# Altium PCB kien_PCB.PcbDoc
Units mil, origin at the board's own origin, x right, y up, seen from the top; angles counter-clockwise.
Board outline 6000 x 4000 mil, 2 copper layers (Top Layer, Bottom Layer); 56 components, 43 nets, 324 pads, 44 vias.
Unrouted connection lines stored in the file: 3.
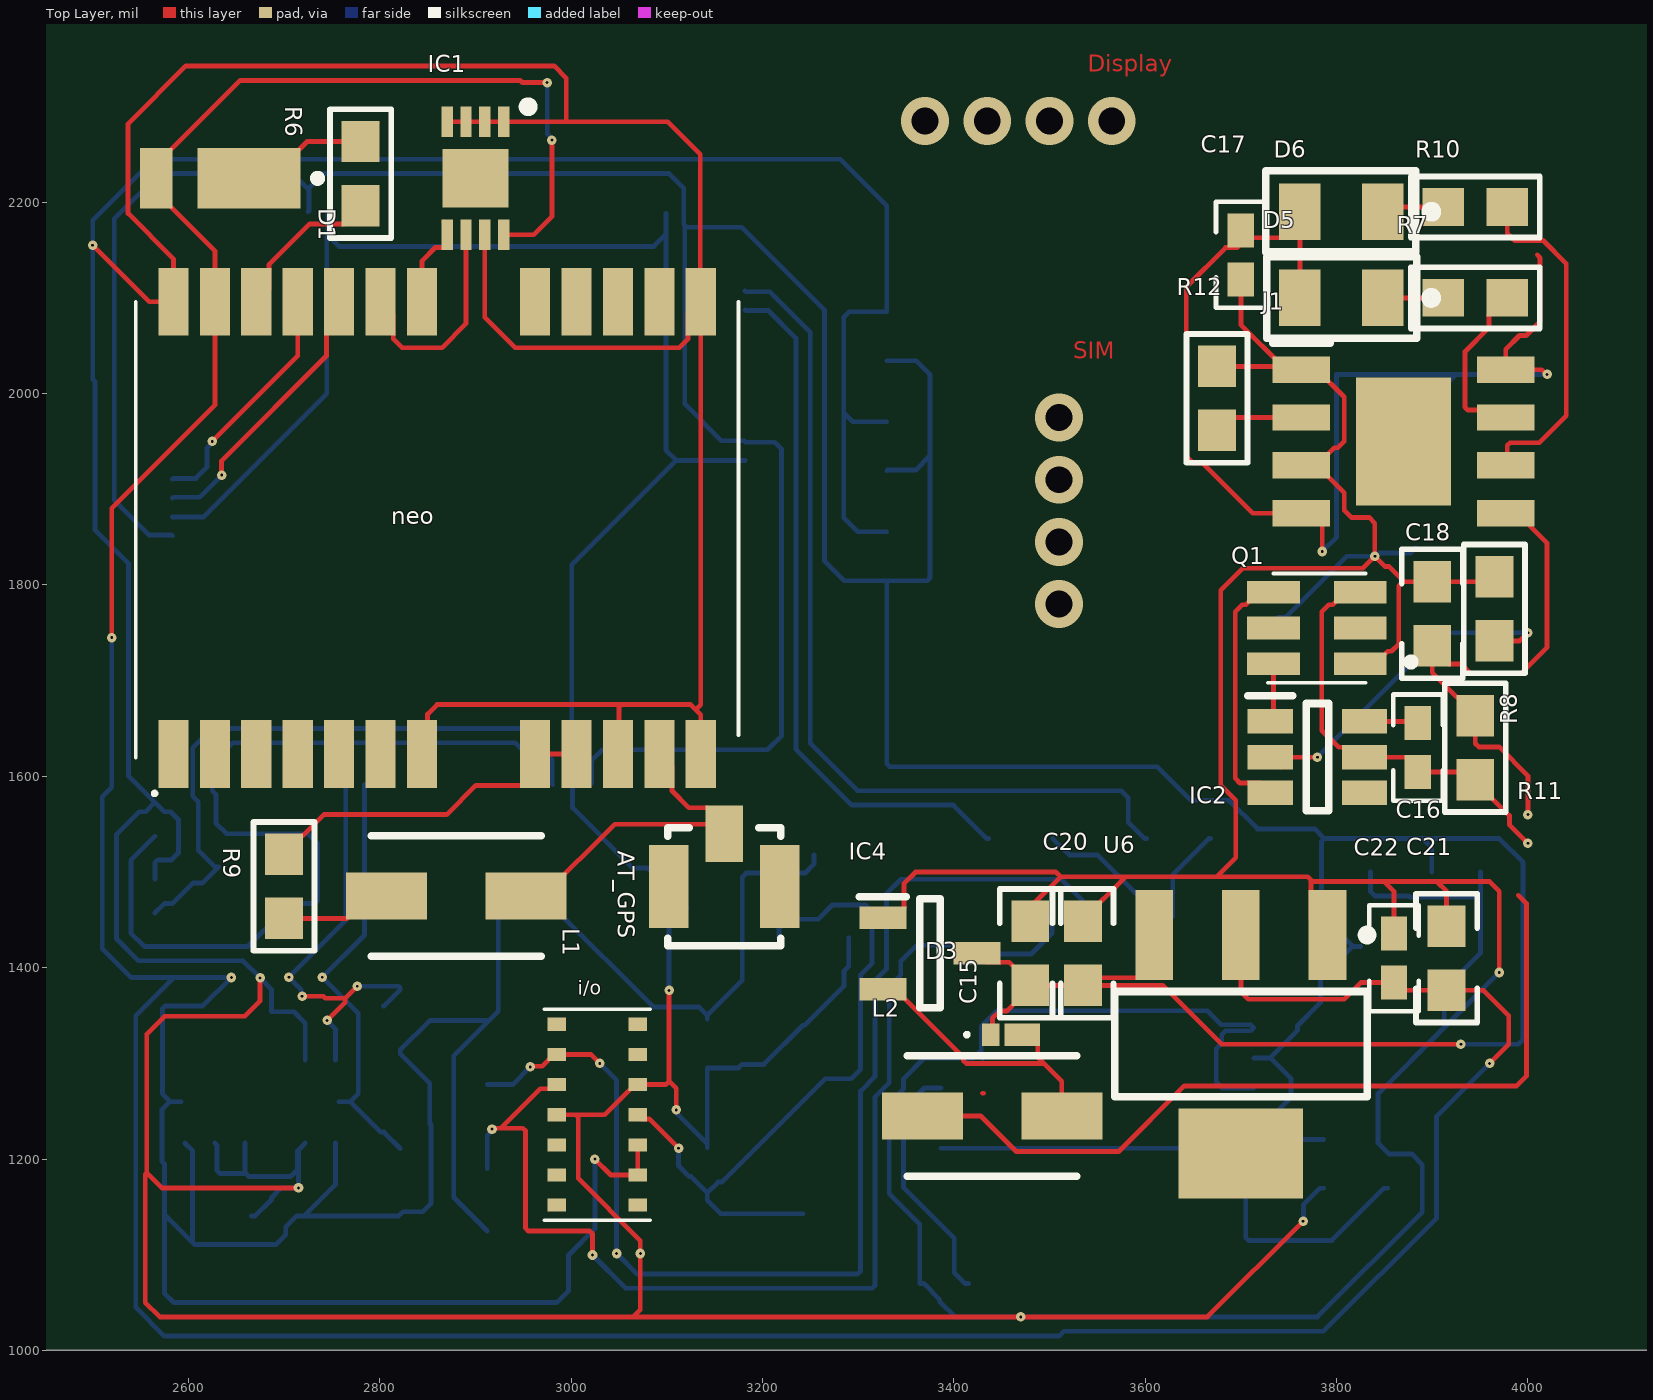
[diagram p0: Top Layer view]
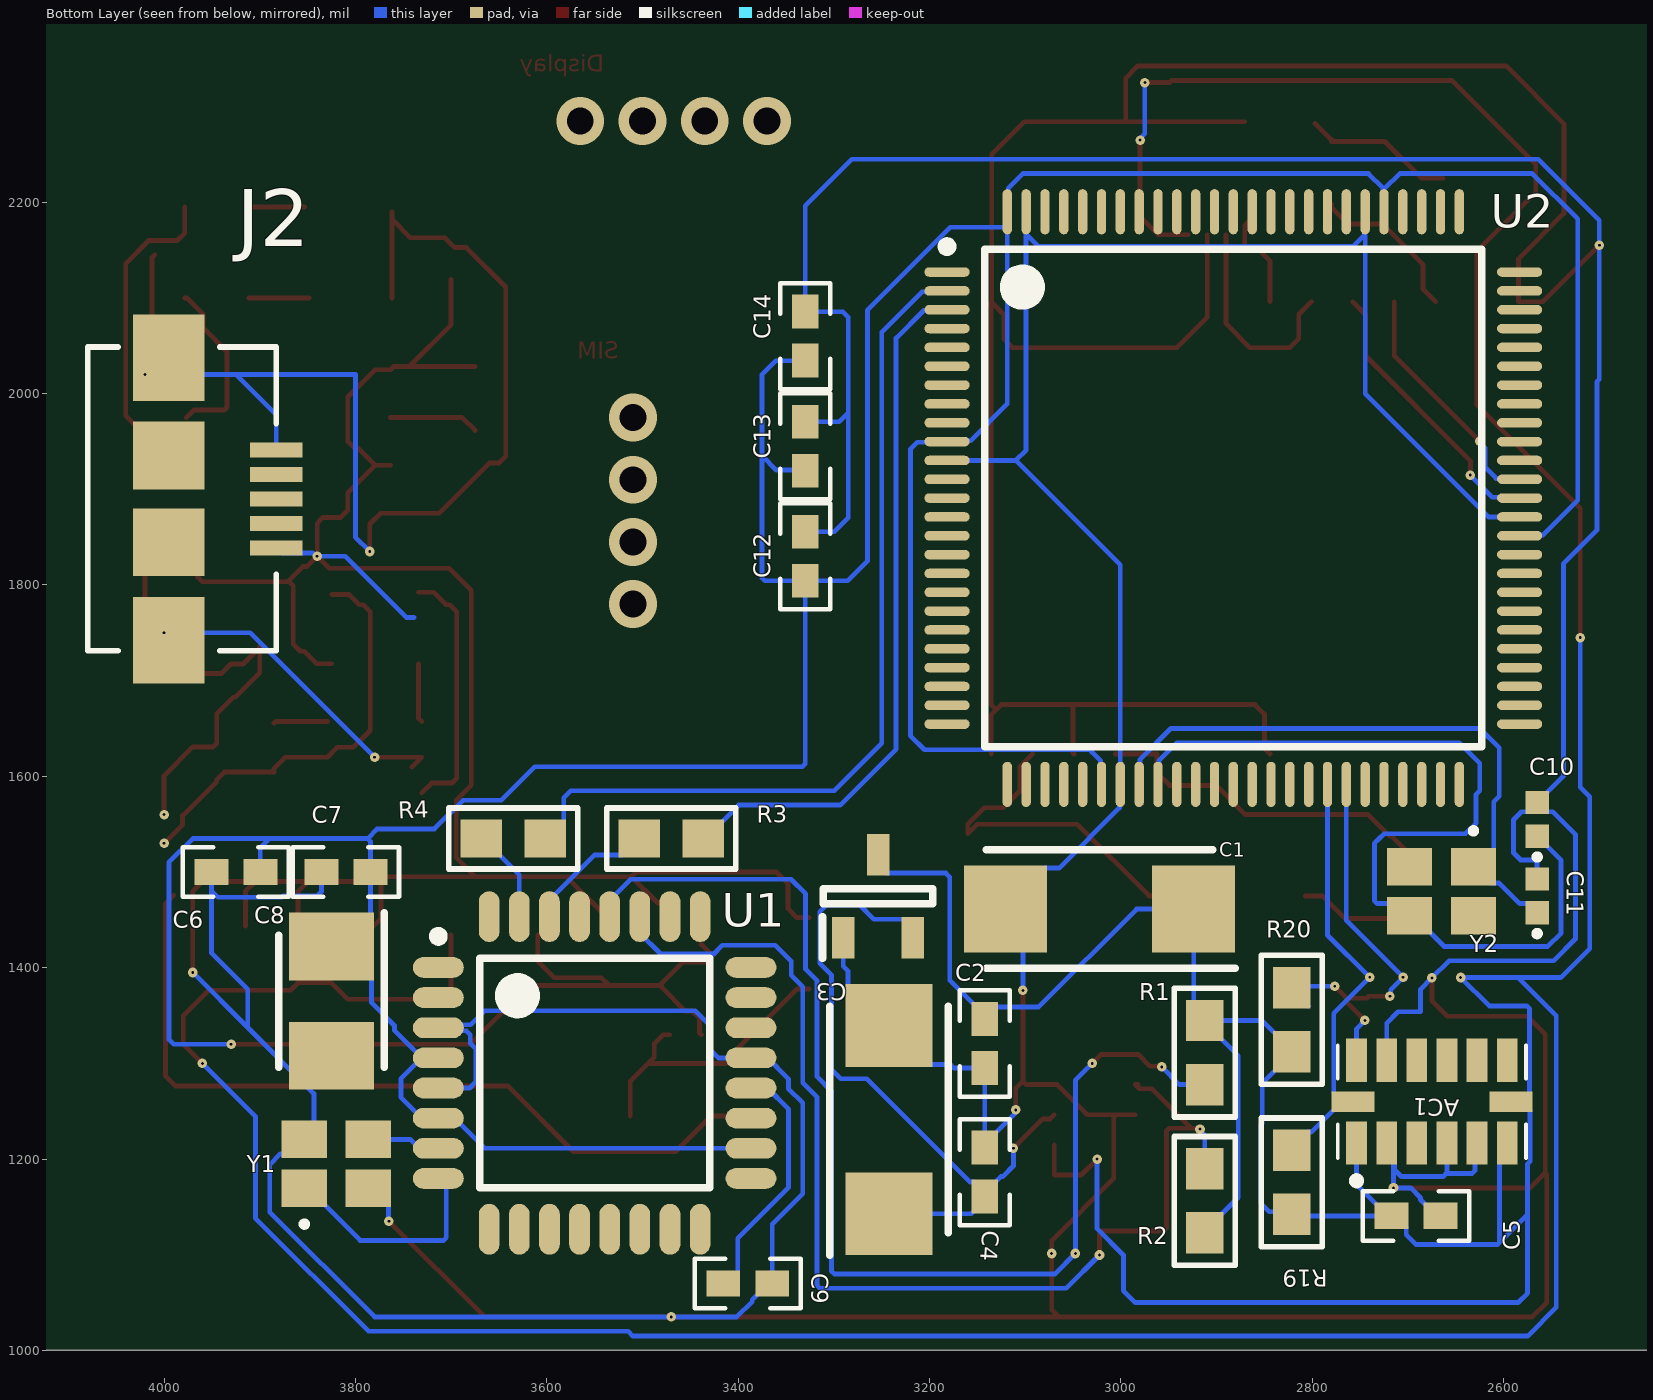
[diagram p1: Bottom Layer view, seen from below]
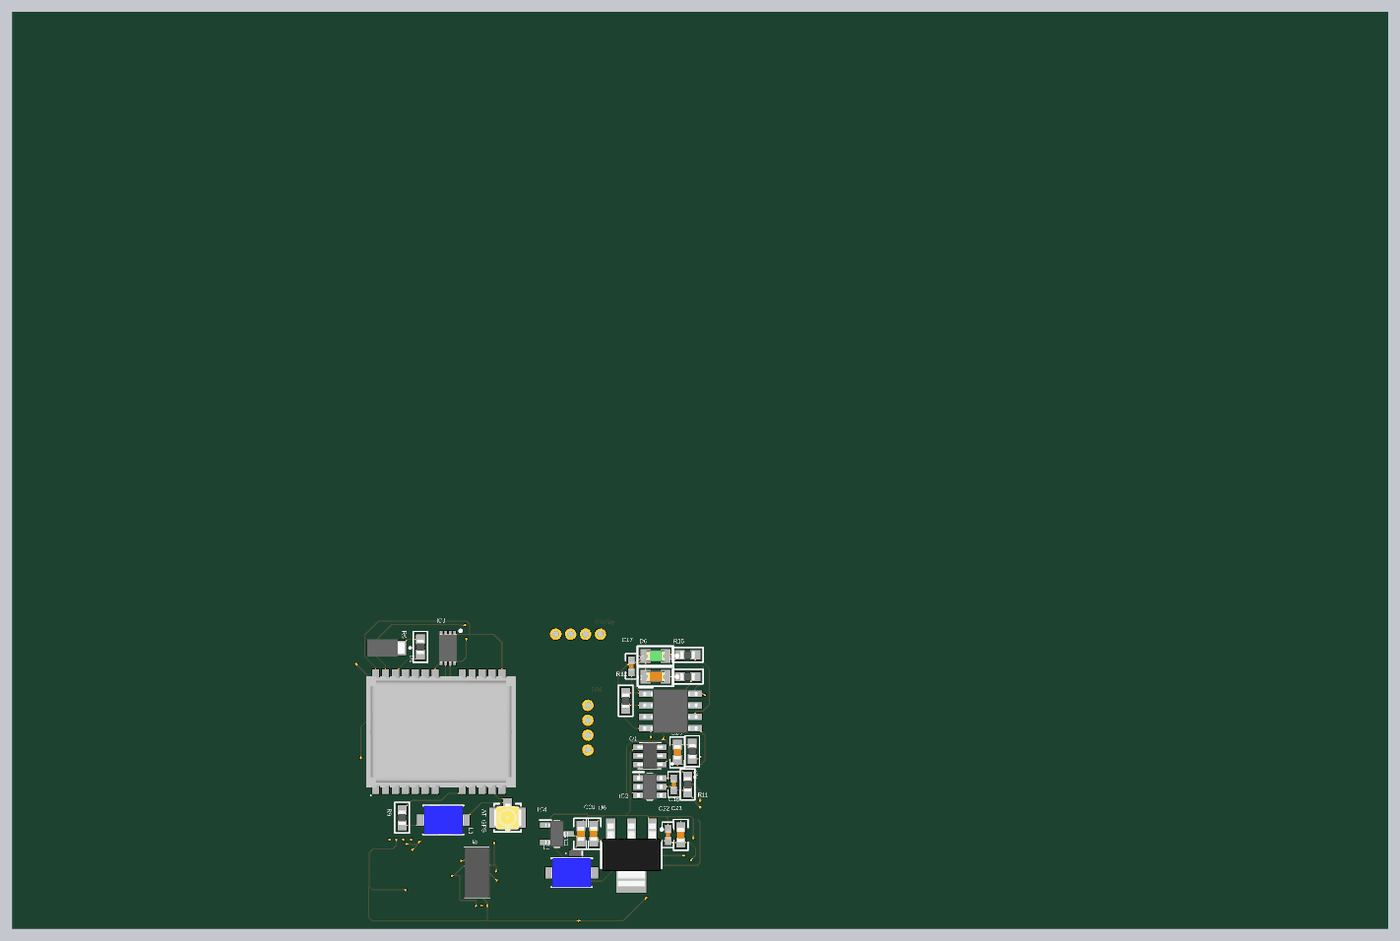
[diagram p2: 3D render of the assembled board from above, using the file's embedded part models]
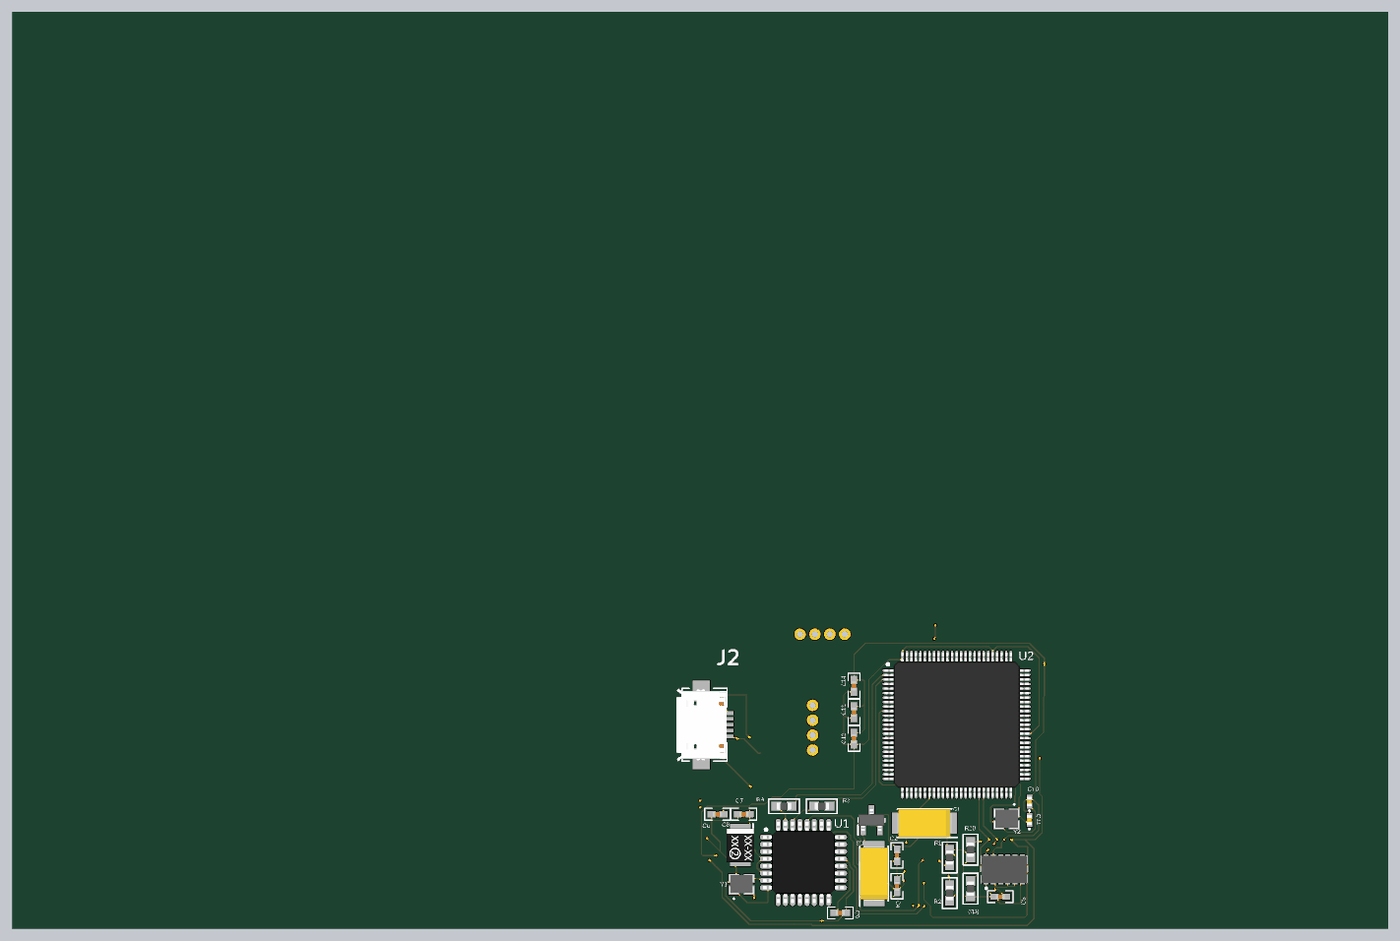
[diagram p3: 3D render of the assembled board from below, using the file's embedded part models]

## Layer stack, top to bottom
Top Solder: solder mask 0.4, Solder Resist, Dk 3.5
Top Layer: signal copper 1.4
Dielectric 1: dielectric 12.6, FR-4, Dk 4.8
Bottom Layer: signal copper 1.4
Bottom Solder: solder mask 0.4, Solder Resist, Dk 3.5

## Board outline
1000,1000 7000,1000 7000,5000 1000,5000

## Design rules (kind name [scope] priority, off if disabled: settings)
Clearance [All] p1: gap=10 ignorepadtopadclearanceinfootprint=FALSE except(0: Arc-Hole Track-Hole SMDPad-Hole THPad-Hole Via-Hole Fill-Hole Poly-Hole Region-Hole Text-Hole)
PolygonConnect [All] p1: connectstyle=Relief reliefconductorwidth=10 reliefentries=4 polygonreliefangle="90 Angle" airgapwidth=10
RoomDefinition kien1_SCH [InComponentClass('kien1_SCH')] p1: confinementstyle=ConfineIn formatcopy=TRUE lockcomponents=FALSE outline 2470,1005 4060,1005 4060,2370 2470,2370
RoutingVias [All] p1: holewidth=10 width=10 viastyle="Through Hole" minholewidth=2 minwidth=2 maxholewidth=10 maxwidth=10
SolderMaskExpansion [All] p1: expansion=4 istentingtop=FALSE
Width [All] p1: maxlimit=5 minlimit=5 preferedwidth=5 minimp=50.000000 maximp=50.000000 favimp=50.000000
30 further rules are at their usual default settings.

## Classes and differential pairs
component class kien1_SCH: AC1 AT_GPS C1 C2 C3 C4 C5 C6 C7 C8 C9 C10 C11 C12 C13 C14 C15 C16 C17 C18 C20 C21 C22 D1 D3 D5 D6 i/o IC1 IC2 IC4 J1 J2 L1 L2 neo Q1 R1 R2 R3 R4 R6 R7 R8 R9 R10 R11 R12 R19 R20

## Components (designator, comment, footprint, x,y, rotation, side; value= is the part's Value field where it differs from the comment)
AC1 "ADXL345" CC-14-1 2675,1260 r90 bottom
AT_GPS "IPEX_CON" U.FL/UMCC 3160,1485 r90 top
C1 "TPSC107K010T0100" CAPPM6032X280N 3022.38,1461.32 r0 bottom
C2 "104/16V" "CAPC-0402 (1005)" 3142.38,1320.73 r270 bottom
C3 "TPSC107K010T0100" CAPPM6032X280N 3242.38,1241.32 r90 bottom
C4 "104/16V" "CAPC-0402 (1005)" 3142.38,1186.32 r270 bottom
C5 "104/16V" "CAPC-0402 (1005)" 2691.54,1140.59 r0 bottom
C6 "1uF" "CAPC-0402 (1005)" 3925,1500 r0 bottom value=105/6.3V
C7 "1uF" "CAPC-0402 (1005)" 3810,1500 r0 bottom value=105/6.3V
C8 "4.7uF" CAPPM3528X210N 3825,1365 r270 bottom
C9 "100nF" "CAPC-0402 (1005)" 3390,1070 r180 bottom value=104/16V
C10 "22pF" C0402 2565,1555 r90 bottom
C11 "22pF" C0402 2565,1475 r90 bottom
C12 "100nF" "CAPC-0402 (1005)" 3330,1830 r90 bottom value=104/16V
C13 "100nF" "CAPC-0402 (1005)" 3330,1945 r90 bottom value=104/16V
C14 "100nF" "CAPC-0402 (1005)" 3330,2060 r90 bottom value=104/16V
C15 "22uF/16V" "CAPC-0603 (1608)" 3480,1415 r90 top
C16 "104/16V" "CAPC-0402 (1005)" 3885,1630 r270 top
C17 "104/16V" "CAPC-0402 (1005)" 3700,2145 r90 top
C18 "106/10V" "CAPC-0603 (1608)" 3900,1770 r90 top
C20 "" "CAPC-0603 (1608)" 3535,1415 r90 top value=106/10V
C21 "" "CAPC-0603 (1608)" 3915,1410 r90 top value=22uF/16V
C22 "" "CAPC-0402 (1005)" 3860,1410 r90 top
D1 "5817" CD123DB120R 2615,2225 r180 top
D3 "1A/20V" NSR10F20NXT5G 3455,1330 r0 top
D5 "2V/20mA" LED_0805_RED 3805,2100 r0 top
D6 "2V4/20mA" LED_0805_GREEN 3805,2190 r0 top
i/o "MAX30100EFD+" MAX30100EFD 3027.38,1246.32 r0 top
IC1 "" SON50P300X200X100-9N-D 2900,2225 r270 top
IC2 "DW01A-G" SOT95P280X135-6N 3780,1620 r0 top
IC4 "ME2108A33M3G" SOT95P250X130-3N 3375,1415 r0 top
J1 "TP4056" SOIC127P600X175-9N 3870,1950 r0 top
J2 "10104110-0001LF" 101041100001LF 3995,1890 r270 bottom
L1 "22uH" INDPM4532X360N 2880,1475 r180 top
L2 "744766122" INDPM4532X360N 3440,1245 r0 top
neo "NEO-6M-0-001" NEO6M0001 2860,1840 r270 top
Q1 "FS8205" FS8205 3805,1755 r180 top
R1 "4K7" "RESC-0603 (1608)" 2912.38,1311.32 r90 bottom
R2 "4K7" "RESC-0603 (1608)" 2912.38,1156.32 r270 bottom
R3 "1K" "RESC-0603 (1608)" 3470,1535 r180 bottom
R4 "1K" "RESC-0603 (1608)" 3635,1535 r180 bottom
R6 "1K" "RESC-0603 (1608)" 2780,2230 r270 top
R7 "1K" "RESC-0603 (1608)" 3945,2100 r0 top
R8 "1K" "RESC-0603 (1608)" 3965,1775 r90 top
R9 "22R" "RESC-0603 (1608)" 2700,1485 r90 top
R10 "1K" "RESC-0603 (1608)" 3945,2195 r0 top
R11 "100R" "RESC-0603 (1608)" 3945,1630 r90 top
R12 "1K2" "RESC-0603 (1608)" 3675,1995 r270 top
R19 "4K7" "RESC-0603 (1608)" 2821.54,1175.59 r90 bottom
R20 "4K7" "RESC-0603 (1608)" 2821.54,1345.59 r90 bottom
U1 "ATmega328-AU" TQFP32 3550,1290 r180 bottom
U2 "ATmega2560-AU" TQFP100L 2882.52,1890.79 r180 bottom
U6 "LM1117-3.3V" SOT223 3700,1320 r180 top
Y1 "CX2520DB16000H0FLJC1" CX2520DB16000H0FLJC1 3820,1195 r180 bottom
Y2 "CX2520DB16000H0FLJC1" CX2520DB16000H0FLJC1 2665,1480 r0 bottom
? "CJ431K" SOT92P240X115-3N 3253.8,1474.7 r90 bottom

## Footprints (in the part's own frame and the unit in brackets; to place one, negate y for a bottom-side part, rotate by r counter-clockwise, add the part's x,y. Pads: shape width x height; smd on the part's side, far side on the other; paste and mask are expansions set on the pad)
101041100001LF [mm]
  rect 0.4x1.4 smd: 1(-1.3,2.85) 2(-0.65,2.85) 3(0,2.85) 4(0.65,2.85) 5(1.3,2.85)
  rect 2.3x1.9 smd: MP1(-3.75,0) MP4(3.75,0)
  rect 1.8x1.9 smd: MP2(-1.15,0) MP3(1.15,0)
  silkscreen extent -4.03,-2.15 4.03,2.85, body extent -4.04,-2.77 4.04,2.8, height 2.76
C0402 [mm]
  rect 0.62x0.62 smd: 1(-0.45,0) 2(0.45,0)
  silkscreen extent -1.05,-0.05 -0.95,0.05, body extent -0.52,-0.28 0.53,0.27, height 0.55
"CAPC-0402 (1005)" [mm] "Resistor Chip, Body 1.0x0.5mm, IPC High Density"
  rect 0.9x0.7 smd mask+0.1: 1(-0.65,0) 2(0.65,0)
  silkscreen extent -1.41,-0.66 1.41,0.66, body extent -0.5,-0.25 0.5,0.25, height 0.5
"CAPC-0603 (1608)" [mm] "Resistor, Chip; 1.60 mm L X 0.80 mm W X 0.50 mm H body"
  rect 1.1x1 smd mask+0.1: 1(-0.85,0) 2(0.85,0)
  silkscreen extent -1.71,-0.81 1.71,0.81, body extent -0.8,-0.4 0.8,0.4, height 0.6
CAPPM3528X210N [mm]
  rect 1.8x2.25 smd: 1(-1.45,0) 2(1.45,0)
  silkscreen extent -2.35,-1.4 1.75,1.4, body extent -1.86,-1.54 1.87,1.53, height 2.13
CAPPM6032X280N [mm]
  rect 2.2x2.3 smd: 1(-2.5,0) 2(2.5,0)
  silkscreen extent -3.6,-1.58 3,1.58, body extent -3,-1.57 3,1.57, height 2.8
CC-14-1 [mm]
  rect 1.145x0.55 smd: 1(-1.098,2) 2(-1.098,1.2) 3(-1.098,0.4) 4(-1.098,-0.4) 5(-1.098,-1.2) 6(-1.098,-2) 8(1.098,-2) 9(1.098,-1.2) 10(1.098,-0.4) 11(1.098,0.4) 12(1.098,1.2) 13(1.098,2)
  rect 0.55x1.145 smd: 7(0,-2.097) 14(0,2.097)
  silkscreen extent -2.2,-2.5 1.5,2.5, body extent -1.5,-2.5 1.5,2.5, height 1
CD123DB120R [mm]
  rect 2.73x1.6 smd: 1(-1.232,0)
  rect 0.86x1.6 smd: 2(1.232,0)
  silkscreen extent -3.1,-0.05 -3,0.05, body extent -2.44,-0.95 1.7,0.95, height 1.26
CX2520DB16000H0FLJC1 [mm]
  rect 1.2x1 smd: 1(-0.85,-0.65) 2(0.85,-0.65) 3(0.85,0.65) 4(-0.85,0.65)
  silkscreen extent -0.9,-1.65 -0.8,-1.55, body extent -1.35,-1.05 1.35,1.05, height 0.65
FS8205 [mm]
  rect 1.4x0.6 smd: 1(-0.5,0.95) 2(-0.5,0) 3(-0.5,-0.95) 4(1.8,0.95) 5(1.8,0) 6(1.8,-0.95)
  silkscreen extent -1.95,-1.45 1.95,1.45, body extent -0.79,-1.45 2.01,1.45, height 1.46
INDPM4532X360N [mm]
  rect 2.15x1.25 smd: 1(-1.85,0) 2(1.85,0)
  silkscreen extent -2.25,-1.6 2.25,1.6, body extent -2.25,-1.6 2.25,1.6, height 3.6
LED_0805_GREEN [mm] "LED SMD; Body 2.0 x 1.3 mm (LxW typ)"
  rect 1.1x1.5 smd: 1(-1.1,0) 2(1.1,0)
  silkscreen extent -2.01,-1.07 2.52,1.09, body extent -1.01,-0.63 1.01,0.62, height 1.1
LED_0805_RED [mm] "LED SMD; Body 2.0 x 1.3 mm (LxW typ)"
  rect 1.1x1.5 smd: 1(-1.1,0) 2(1.1,0)
  silkscreen extent -1.98,-1.07 2.52,1.09, body extent -1.01,-0.62 1.01,0.63, height 1.1
MAX30100EFD [mm]
  rect 0.5x0.35 smd: 1(-1.075,2.4) 2(-1.075,1.6) 3(-1.075,0.8) 4(-1.075,0) 5(-1.075,-0.8) 6(-1.075,-1.6) 7(-1.075,-2.4) 8(1.075,-2.4) 9(1.075,-1.6) 10(1.075,-0.8) 11(1.075,0) 12(1.075,0.8) 13(1.075,1.6) 14(1.075,2.4)
  silkscreen extent -1.4,-2.8 1.4,2.8, body extent -1.4,-2.8 1.4,2.8, height 1.27
NEO6M0001 [mm]
  rect 1.8x0.8 smd: 1(5.5,-7) 2(5.5,-5.9) 3(5.5,-4.8) 4(5.5,-3.7) 5(5.5,-2.6) 6(5.5,-1.5) 7(5.5,-0.4) 8(5.5,2.6) 9(5.5,3.7) 10(5.5,4.8) 11(5.5,5.9) 12(5.5,7) 13(-6.5,7) 14(-6.5,5.9) 15(-6.5,4.8) 16(-6.5,3.7) 17(-6.5,2.6) 18(-6.5,-0.4) 19(-6.5,-1.5) 20(-6.5,-2.6) 21(-6.5,-3.7) 22(-6.5,-4.8) 23(-6.5,-5.9) 24(-6.5,-7)
  silkscreen extent -6.5,-8 6.6,8, body extent -6.66,-8.05 5.64,8.55, height 2.64
NSR10F20NXT5G [mm]
  rect 0.47x0.6 smd: 1(-0.42,0)
  rect 0.95x0.6 smd: 2(0.42,0)
  silkscreen extent -1.1,-0.05 -1,0.05, body extent -0.7,-0.3 0.83,0.3, height 0.41
"RESC-0603 (1608)" [mm] "Resistor, Chip; 1.60 mm L X 0.80 mm W X 0.50 mm H body"
  rect 1.1x1 smd mask+0.1: 1(-0.85,0) 2(0.85,0)
  silkscreen extent -1.71,-0.81 1.71,0.81, body extent -0.8,-0.4 0.8,0.4, height 0.5
SOIC127P600X175-9N [mm]
  rect 1.525x0.7 smd: 1(-2.712,1.905) 2(-2.712,0.635) 3(-2.712,-0.635) 4(-2.712,-1.905) 5(2.712,-1.905) 6(2.712,-0.635) 7(2.712,0.635) 8(2.712,1.905)
  rect 2.513x3.402 smd: 9(0,0)
  silkscreen extent -3.47,2.61 -1.95,2.61, body extent -3,-2.45 3,2.45, height 1.75
SON50P300X200X100-9N-D [mm]
  rect 0.8x0.3 smd: 1(-1.5,0.75) 2(-1.5,0.25) 3(-1.5,-0.25) 4(-1.5,-0.75) 5(1.5,-0.75) 6(1.5,-0.25) 7(1.5,0.25) 8(1.5,0.75)
  rect 1.55x1.75 smd: 9(0,0)
  silkscreen extent -2.02,1.28 -1.78,1.53, body extent -1.55,-1 1.55,1, height 1
SOT92P240X115-3N [mm]
  rect 1.1x0.6 smd: 1(-1.1,0.925) 2(-1.1,-0.925) 3(1.1,0)
  silkscreen extent -1.65,-1.45 0.2,1.48, body extent -1.2,-1.45 1.2,1.45, height 1.15
SOT95P250X130-3N [mm]
  rect 1.25x0.6 smd: 1(-1.25,0.95) 2(-1.25,-0.95) 3(1.25,0)
  silkscreen extent -1.88,-1.45 0.28,1.5, body extent -1.25,-1.45 1.25,1.45, height 1.3
SOT95P280X135-6N [mm]
  rect 1.2x0.65 smd: 1(-1.25,0.95) 2(-1.25,0) 3(-1.25,-0.95) 4(1.25,-0.95) 5(1.25,0) 6(1.25,0.95)
  silkscreen extent -1.85,-1.43 0.3,1.63, body extent -1.4,-1.43 1.4,1.43, height 1.35
SOT223 [mm]
  rect 1x2.4 smd: 1(-2.3,-2.9) 2(0,-2.9) 3(2.3,-2.9)
  rect 3.3x2.4 smd: 4(0,2.9)
  silkscreen extent -3.48,-3.02 3.35,1.4, body extent -3.25,-3.56 3.25,3.4, height 1.68
TQFP32 [mm] "Thin QFP, 32-Leads, Body 9x9mm, Pitch 0.8mm, IPC Low Density"
  oval 1.35x0.55 smd: 1(-4.15,2.8) 2(-4.15,2) 3(-4.15,1.2) 4(-4.15,0.4) 5(-4.15,-0.4) 6(-4.15,-1.2) 7(-4.15,-2) 8(-4.15,-2.8) 17(4.15,-2.8) 18(4.15,-2) 19(4.15,-1.2) 20(4.15,-0.4) 21(4.15,0.4) 22(4.15,1.2) 23(4.15,2) 24(4.15,2.8)
  oval 0.55x1.35 smd: 9(-2.8,-4.15) 10(-2,-4.15) 11(-1.2,-4.15) 12(-0.4,-4.15) 13(0.4,-4.15) 14(1.2,-4.15) 15(2,-4.15) 16(2.8,-4.15) 25(2.8,4.15) 26(2,4.15) 27(1.2,4.15) 28(0.4,4.15) 29(-0.4,4.15) 30(-1.2,4.15) 31(-2,4.15) 32(-2.8,4.15)
  silkscreen extent -4.28,-3.05 3.05,3.75, body extent -4.5,-4.5 4.5,4.5, height 1.4
TQFP100L [mm] "TQFP, 100-Leads, Body 14.00x14.00mm, Pitch 0.50mm, IPC High Density"
  oval 1.2x0.25 smd: 1(-7.6,6) 2(-7.6,5.5) 3(-7.6,5) 4(-7.6,4.5) 5(-7.6,4) 6(-7.6,3.5) 7(-7.6,3) 8(-7.6,2.5) 9(-7.6,2) 10(-7.6,1.5) 11(-7.6,1) 12(-7.6,0.5) 13(-7.6,0) 14(-7.6,-0.5) 15(-7.6,-1) 16(-7.6,-1.5) 17(-7.6,-2) 18(-7.6,-2.5) 19(-7.6,-3) 20(-7.6,-3.5) 21(-7.6,-4) 22(-7.6,-4.5) 23(-7.6,-5) 24(-7.6,-5.5) 25(-7.6,-6) 51(7.6,-6) 52(7.6,-5.5) 53(7.6,-5) 54(7.6,-4.5) 55(7.6,-4) 56(7.6,-3.5) 57(7.6,-3) 58(7.6,-2.5) 59(7.6,-2) 60(7.6,-1.5) 61(7.6,-1) 62(7.6,-0.5) 63(7.6,0) 64(7.6,0.5) 65(7.6,1) 66(7.6,1.5) 67(7.6,2) 68(7.6,2.5) 69(7.6,3) 70(7.6,3.5) 71(7.6,4) 72(7.6,4.5) 73(7.6,5) 74(7.6,5.5) 75(7.6,6)
  oval 0.25x1.2 smd: 26(-6,-7.6) 27(-5.5,-7.6) 28(-5,-7.6) 29(-4.5,-7.6) 30(-4,-7.6) 31(-3.5,-7.6) 32(-3,-7.6) 33(-2.5,-7.6) 34(-2,-7.6) 35(-1.5,-7.6) 36(-1,-7.6) 37(-0.5,-7.6) 38(0,-7.6) 39(0.5,-7.6) 40(1,-7.6) 41(1.5,-7.6) 42(2,-7.6) 43(2.5,-7.6) 44(3,-7.6) 45(3.5,-7.6) 46(4,-7.6) 47(4.5,-7.6) 48(5,-7.6) 49(5.5,-7.6) 50(6,-7.6) 76(6,7.6) 77(5.5,7.6) 78(5,7.6) 79(4.5,7.6) 80(4,7.6) 81(3.5,7.6) 82(3,7.6) 83(2.5,7.6) 84(2,7.6) 85(1.5,7.6) 86(1,7.6) 87(0.5,7.6) 88(0,7.6) 89(-0.5,7.6) 90(-1,7.6) 91(-1.5,7.6) 92(-2,7.6) 93(-2.5,7.6) 94(-3,7.6) 95(-3.5,7.6) 96(-4,7.6) 97(-4.5,7.6) 98(-5,7.6) 99(-5.5,7.6) 100(-6,7.6)
  silkscreen extent -7.73,-6.6 6.6,6.8, body extent -8,-8 8,8, height 1.2
U.FL/UMCC [mm] "U.FL (UMCC) Connector Jack, Male Pin 50Ohm Surface Mount Solder"
  rect 1.5x1 smd: 1(1.4,0)
  rect 2.2x1.05 smd: 2(0,1.475) 2(0,-1.475)
  Top Layer pour cut-out: -1.2,0 -1.109,-0.459 -0.849,-0.849 -0.459,-1.109 0,-1.2 0,-1.2 0,-1.2 0.457,-1.109 0.845,-0.85 1.104,-0.462 1.195,-0.005 1.195,-0.005 1.195,0.005 1.104,0.462 0.845,0.85 0.457,1.109 0,1.2 0,1.2 0,1.2 -0.459,1.109 -0.849,0.849 -1.109,0.459 -1.2,0
  silkscreen extent -1.58,-1.5 1.55,1.5, body extent -1.55,-1.5 1.55,1.5, height 1.25

## Part data
AC1: "Accelerometer", Manufacturer_Name="Analog Devices", Mouser Part Number=N/A, Datasheet Link=http://www.analog.com/media/en/technical-documentation/data-sheets/ADXL345.pdf, Manufacturer_Part_Number=ADXL345, Mouser Price/Stock=https://www.mouser.co.uk/ProductDetail/Analog-Devices/ADXL345?qs=5aG0NVq1C4y%252BItyqaAF9pQ%3D%3D
AT_GPS: library part LTI-IPXSM66AL, "IPEX CONNECTER ANTENNA GPS GSM", MPN=LTI-IPXSM66AL, Solder=SMT
C1 C3: "Capacitor Polarised", Manufacturer_Name=AVX, Mouser Part Number=581-TPSC107K010T0100, Arrow Part Number=TPSC107K010T0100, Arrow Price/Stock=https://www.arrow.com/en/products/tpsc107k010t0100/avx, Datasheet Link=http://datasheets.avx.com/TPS_AUTO.pdf, Height=2.8mm, Manufacturer_Part_Number=TPSC107K010T0100, Mouser Price/Stock=https://www.mouser.co.uk/ProductDetail/AVX/TPSC107K010T0100?qs=W0yvOO0ixfG5lUxjN8PSqA%3D%3D
C2 C4 C5 C9 C12 C13 C14 C16 C17: library part CC0402KRX7R7BB104, "CAP CER 0.1UF 16V X7R 0402", Category=Capacitor, MPN=CC0402KRX7R7BB104, MPR=Yageo, Sloder=SMD
C6 C7: library part CC0402KRX5R5BB105, "CAP CER 1UF 6.3V X5R 0402", Manufactory=Yageo, Category=Capacitor, MPN=CC0402KRX5R5BB105, MPR=Yageo, Sloder=0402
C8: library part TL3B475M016C2900, "Capacitor Polarised", Manufacturer_Name=Vishay, Datasheet Link=http://www.vishay.com/doc?40154, Height=2.1mm, Manufacturer_Part_Number=TL3B475M016C2900
C10 C11: library part C0402C220J4GACAUTO, "Capacitor", Manufacturer_Name=KEMET, Mouser Part Number=80-C0402C220J4GAUTO, Datasheet Link=https://content.kemet.com/datasheets/KEM_C1022_C0G_AUTO_SMD.pdf, Height=0.55mm, Manufacturer_Part_Number=C0402C220J4GACAUTO, Mouser Price/Stock=https://www.mouser.co.uk/ProductDetail/KEMET/C0402C220J4GACAUTO?qs=PqoDHHvF64%252Bwa4ISBxnBSA%3D%3D
C15 C21: library part CL10A226MO7JZNC, "CAP CER 22UF 16V X5R 0603", Category=CAPACITOR, MPN=CL10A226MO7JZNC, PinCount=2, Solder=SMT
C18 C20: library part CL10A106KP8NNNC, "CAP CER 10uF 10% 10V X5R 0603", Category=CAPACITOR, CompanyID=VT-00984, MPN=CL10A106KP8NNNC, PinCount=2, Solder=SMT
C22: library part GRM155R71A104JA01D, "CAP CER 0.1UF 10V X7R 0402", MFR="Murata Electronics", Category=Capacitor, MPN=GRM155R71A104JA01D, Sloder=0402
D1: library part CD123D-B120R, "Diode", Manufacturer_Name=Bourns, Mouser Part Number=652-CD123D-B120R, Arrow Part Number=CD123D-B120R, Arrow Price/Stock=https://www.arrow.com/en/products/cd123d-b120r/bourns?region=nac, Datasheet Link=https://www.mouser.com/datasheet/2/54/bourns_CD123D-B1xR-1159223.pdf, Height=1.16mm, Manufacturer_Part_Number=CD123D-B120R, Mouser Price/Stock=https://www.mouser.co.uk/ProductDetail/Bourns/CD123D-B120R?qs=xhbEVWpZdWd9fFlvin9bCQ%3D%3D
D3: library part NSR10F20NXT5G, "Diode", Manufacturer_Name=onsemi, Mouser Part Number=863-NSR10F20NXT5G, Arrow Part Number=NSR10F20NXT5G, Arrow Price/Stock=https://www.arrow.com/en/products/nsr10f20nxt5g/on-semiconductor?region=nac, Datasheet Link=https://componentsearchengine.com/Datasheets/2/NSR10F20NXT5G.pdf, Height=0.31mm, Manufacturer_Part_Number=NSR10F20NXT5G, Mouser Price/Stock=https://www.mouser.co.uk/ProductDetail/onsemi/NSR10F20NXT5G?qs=Ddzdinyxz%2FkokTQ%2FhtOuYg%3D%3D
D5: library part 17-215SURC/S530-A3/TR8, "LED RED CLEAR 0805 SMD", CompanyID=VT-00379, MPN=17-215SURC/S530-A3/TR8, Solder=SMT
D6: library part 17-21/G6C-FM1N2B/3T, "LED GREEN CLEAR 2V4 20mA 0805 SMD", CompanyID=VT-00393, MPN=17-21/G6C-FM1N2B/3T, Solder=SMT
i/o: "Integrated Circuit", Manufacturer_Name="Maxim Integrated", Mouser Part Number=700-MAX30100EFD+, Datasheet Link=https://datasheets.maximintegrated.com/en/ds/MAX30100.pdf, Height=3mm, Manufacturer_Part_Number=MAX30100EFD+, Mouser Price/Stock=https://www.mouser.co.uk/ProductDetail/Maxim-Integrated/MAX30100EFD%2b?qs=Y0gyZw6qHXfLbN1SzW9wqw%3D%3D
IC1: library part 24AA32AT-I_MC, "Integrated Circuit", Arrow Part Number=24AA32AT-I/MC, Manufacturer_Name=Microchip, Mouser Part Number=579-24AA32AT-I/MC, Arrow Price/Stock=https://www.arrow.com/en/products/24aa32at-imc/microchip-technology, Datasheet Link=http://uk.rs-online.com/web/p/products/8261540, Height=1mm, Manufacturer_Part_Number=24AA32AT-I/MC, Mouser Price/Stock=https://www.mouser.co.uk/ProductDetail/Microchip-Technology/24AA32AT-I-MC/?qs=3GBkE4%2F1xo7gRH46Ervlgw%3D%3D
IC2: "Integrated Circuit", Manufacturer_Name="Fortune Semiconductor Corporation", Datasheet Link=http://acoptex.com/uploads/DW01A.pdf, Height=1.35mm, Manufacturer_Part_Number=DW01A-G
IC4: "Integrated Circuit", Manufacturer_Name=Microne, Datasheet Link=https://datasheet.lcsc.com/szlcsc/Nanjing-Micro-One-Elec-ME2108A50M3G_C14839.pdf, Height=1.3mm, Manufacturer_Part_Number=ME2108A33M3G
J1: "Connector", Manufacturer_Name="NanJing Top Power", Datasheet Link=https://dlnmh9ip6v2uc.cloudfront.net/datasheets/Prototyping/TP4056.pdf, Height=1.75mm, Manufacturer_Part_Number=TP4056
J2: "Connector", Manufacturer_Name=Amphenol, Mouser Part Number=649-10104110-0001LF, Arrow Part Number=10104110-0001LF, Arrow Price/Stock=https://www.arrow.com/en/products/10104110-0001lf/amphenol-fci?region=nac, Datasheet Link=https://componentsearchengine.com/Datasheets/1/10104110-0001LF.pdf, Height=2.98mm, Manufacturer_Part_Number=10104110-0001LF, Mouser Price/Stock=https://www.mouser.co.uk/ProductDetail/Amphenol-FCI/10104110-0001LF?qs=3wMSRtz0%252BRoQF1VV4tle7w%3D%3D
L1: library part 744766122, "Inductor", Manufacturer_Name="Wurth Elektronik", Mouser Part Number=710-744766122, Datasheet Link=https://www.we-online.com/catalog/datasheet/744766122.pdf, Height=3.6mm, Manufacturer_Part_Number=744766122, Mouser Price/Stock=https://www.mouser.com/Search/Refine.aspx?Keyword=710-744766122
L2: "Inductor", Manufacturer_Name="Wurth Elektronik", Mouser Part Number=710-744766122, Datasheet Link=https://www.we-online.com/catalog/datasheet/744766122.pdf, Height=3.6mm, Manufacturer_Part_Number=744766122, Mouser Price/Stock=https://www.mouser.com/Search/Refine.aspx?Keyword=710-744766122
neo: "Integrated Circuit", Manufacturer_Name=U-Blox, Datasheet Link=https://www.u-blox.com/sites/default/files/products/documents/NEO-6_DataSheet_%28GPS.G6-HW-09005%29.pdf, Height=2.6mm, Manufacturer_Part_Number=NEO-6M-0-001
Q1: "MOSFET (N-Channel)", Manufacturer_Name="Fortune Semiconductor Corporation", Datasheet Link=https://www.ic-fortune.com/upload/Download/FS8205-DS-19_EN.pdf, Height=1mm, Manufacturer_Part_Number=FS8205
R1 R2 R19 R20: library part RC0603FR-074K7L, "RES SMD 4.7K OHM 1% 1/10W 0603", Category=RESISTOR, CompanyID=VT-00327, MPN=RC0603FR-074K7L, Solder=SMT
R3 R4 R6 R7 R8 R10: library part RC0603FR-071KL, "RES SMD 1 KOHM 1% 1/10W 0603", Category=RESISTOR, CompanyID=VT-00574, MPN=RC0603FR-071KL, Solder=SMT
R9: library part RC0603FR-0722RL, "RES SMD 22 OHM 1% 1/10W 0603", Category=RESISTOR, CompanyID=VT-00881, MPN=RC0603FR-0722RL, Solder=SMT
R11: library part RC0603FR-07100RL, "RES SMD 100 OHM 1% 1/10W 0603", Category=RESISTOR, CompanyID=VT-00499, MPN=RC0603FR-07100RL, Solder=SMT
R12: library part RC0603FR-071K2L, "RES SMD 1.2K OHM 1% 1/10W 0603", Category=RESISTOR, CompanyID=VT-01075, MPN=RC0603FR-071K2L, Solder=SMT
U1: "8-bit AVR Microcontroller, 32KB Flash, 1KB EEPROM, 2KB SRAM, 32-pin TQFP, Industrial Grade (-40°C to 85°C)", Supplier Part Number 1=ATMEGA328-AU-ND, Code_JEDEC=MS-026-ABA, ComponentLink1Description="Manufacturer Link", ComponentLink1URL=http://www.atmel.com/products/avr/default.asp?, ComponentLink2Description="ATmega48A/48PA/88A/88PA/168A/168PA/328/328P Datasheet", ComponentLink2URL=http://www.atmel.com/dyn/resources/prod_documents/8271.pdf, ComponentLink3Description="ATmega48A/48PA/88A/88PA/168A/168PA/328/328P Summary", ComponentLink3URL=http://www.atmel.com/dyn/resources/prod_documents/8271S.pdf, ComponentLink4Description="Atmel.com Home", ComponentLink4URL=http://www.atmel.com, DatasheetVersion="revA, Jan-2010", PackageDescription="32-Lead, 7x7x1.0 mm Body, 0.8mm Lead Pitch, Thin Profile Plastic Quad Flat Package (TQFP)", PackageReference=32A, PackageVersion="revB, Oct-2001", Published=1-Apr-2010, Publisher="Altium Limited", Supplier 1=Digi-Key, Supplier 2=Mouser, Supplier Part Number 2=556-ATMEGA328-AU
U2: "8-bit AVR Microcontroller, 4.5-5.5V, 256KB Flash, 4KB EEPROM, 8KB SRAM, 86 GPIO pins, 100-pin TQFP, Industrial Grade (-40°C to 85°C), Pb-Free", Supplier Part Number 1=ATMEGA2560-16AUR-ND, Supplier 1=Digi-Key
U6: library part LM1117, "800mA Low-Dropout Linear Regulator", Creator="Nguyen Ba Bien", Website=http://group3i.net
Y1 Y2: "Crystal or Oscillator", Manufacturer_Name=KYOCERA, Mouser Part Number=581-CX2520DB16000HLJ, Datasheet Link=https://media.digikey.com/pdf/Data%20Sheets/AVX%20PDFs/CX2520DB_USY1M-H1-16429-00_Spec.pdf, Height=0.55mm, Manufacturer_Part_Number=CX2520DB16000H0FLJC1
?: "Integrated Circuit", Manufacturer_Name="Changjiang Electronics Tech (CJ)", Datasheet Link=https://datasheet.lcsc.com/szlcsc/Changjiang-Electronics-Tech-CJ-CJ431K_C67383.pdf, Height=1.15mm, Manufacturer_Part_Number=CJ431K

## Via types
v1: diameter 10, hole 3, Top Layer to Bottom Layer, 36 vias
v2: diameter 50, hole 28, Top Layer to Bottom Layer, 8 vias

## Nets (pads, with @x,y where several pads share a name; then routed paths per layer and width w, separated by ;. In a path a pad name is that pad's centre, name@x,y a point inside that pad or via, vN(x,y) a via of type N, cw(c..) or ccw(c..) an arc to the next point about the centre after c; other vN are vias at no path point)
GND: ?.1 AC1.2 AC1.4 AC1.5 AC1.12 C1.2 C2.2 C3.2 C4.1 C5.1 C6.2 C7.2 C8.2 C9.2 C10.2 C11.2 C12.2 C13.2 C14.2 C15.2 C17.1 C18.2 C20.2 C21.2 C22.2 i/o.4 i/o.12 IC1.1 IC1.2 IC1.3 IC1.4 IC1.7 IC4.1 J1.1 J1.3 J2.5 neo.7 neo.10 neo.12 neo.13 neo.24 Q1.1 R8.2 R12.1 U1.3 U1.5 U1.21 U2.11 U2.32 U2.62 U2.81 U2.99 U6.1 Y1.2 Y1.4 | length 14380
  Top Layer w5: v1(2500,2155) 2559.09,2095.91 neo.24 2584.41,2140.98 2537.07,2188.33 2537.07,2282.07 2597.5,2342.5 2982.25,2342.5 2995,2329.75 2995,2284.06 ; v1(2675,1389.32) 2675,1365.21 2659.13,1349.34 2575.29,1349.34 2556.54,1330.59 2556.54,1185.59 ; v1(2715.16,1169.89) 2572.24,1169.89 2556.54,1185.59 ; neo.7 2850,1629.21 2850,1665 2860,1675 3052.93,1675 ; IC1.4 IC1.3 IC1.2 IC1.1 2995,2284.06 ; IC1.7 2909.84,2079.57 2941.44,2047.97 3113.21,2047.97 3122.34,2057.11 3122.34,2082.66 neo.13 ; i/o.4 3005,1246.32 ; neo.10 3050,1624.49 3050,1672.07 3052.93,1675 ; v1(3102.38,1376.32) 3102.38,1281.32 ; v1(3109.88,1251.32) 3109.88,1273.82 3102.38,1281.32 ; neo.12 3135.59,1664.41 3130.3,1669.7 ; neo.13@3138.94,2092.56 neo.13 ; IC4.1 3338.58,1452.4 3347.89,1461.71 3347.89,1487.89 3360,1500 3506.54,1500 3511.54,1495 ; C15.2@3465,1448.46 3465,1450.43 3482.19,1467.62 3484.15,1467.62 3511.54,1495 ; C20.2 3535,1450.43 3579.57,1495 ; R12.1 J1.1@3743.52,2028.46 ; C17.1 3700,2071.99 J1.1@3743.52,2028.46 ; J1.3 J1.3@3779.47,1925 ; v1(3765,1135) 3665,1035 v1(3470,1035) 3065,1035 ; U6.1 3773.37,1451.36 3773.37,1491.63 ; Q1.1 3840.43,1717.6 3853.52,1730.69 3857.42,1730.69 3865,1738.27 3865,1799.13 3869.33,1803.46 ; C22.2 3860,1480 3850,1490 ; C21.2 3915,1480 3905,1490 ; R8.2 3960,1803.46 C18.2 3869.33,1803.46 ; v1(3970,1395) 3970,1480 3960,1490 3905,1490 ; 2556.54,1185.59 2555,1184.06 2555,1050 2570,1035 3065,1035 ; 2995,2284.06 3100.94,2284.06 3135,2250 3135,2096.5 neo.13 ; 3005,1246.32 3007.4,1243.92 3007.4,1179.72 3072.38,1114.74 v1(3072.38,1101.32) 3072.38,1042.38 3065,1035 ; 3005,1246.32 3035.26,1246.32 3066.75,1277.82 i/o.12 3098.88,1277.82 3102.38,1281.32 ; 3052.93,1675 3125,1675 3130.3,1669.7 ; 3130.3,1669.7 3135.59,1675 neo.13 ; 3511.54,1495 3579.57,1495 ; 3579.57,1495 3674.78,1495 ; 3674.78,1495 3694.67,1514.88 3694.67,1575 3679.07,1590.59 3679.07,1794.39 3702.18,1817.5 3827.5,1817.5 v1(3840,1830) ; 3674.78,1495 3770,1495 3773.37,1491.63 ; J1.1@3743.52,2028.46 3759.76,2028.46 J1.1 3779.47,2025 3808.03,1996.44 3808.03,1950 3801.38,1943.35 3797.82,1943.35 J1.3@3779.47,1925 ; 3773.37,1491.63 3775,1490 3850,1490 ; J1.3@3779.47,1925 3808.03,1896.44 3808.03,1877.85 3815.35,1870.53 3833.94,1870.53 3840,1864.47 v1(3840,1830) ; v1(3840,1830) 3850.78,1819.22 3854.92,1819.22 3869.33,1804.8 3869.33,1803.46 ; 3850,1490 3905,1490
  Bottom Layer w5: C11.2 2565,1509.65 2567.93,1512.58 2582.38,1512.58 2589.7,1519.9 2589.7,1554.67 2581.36,1563.01 2574.7,1563.01 C10.2 ; U2.62 2615.99,1871.1 2744.72,1999.84 2744.72,2165.42 ; AC1.5 2630,1214.55 2630,1187.93 2632.93,1185 2660,1185 ; AC1.4 2659.25,1185.75 2660,1185 ; C5.1 2669.88,1140.59 2686.91,1157.62 2686.91,1159.55 2697.25,1169.89 v1(2715.16,1169.89) AC1.2@2715.16,1209.7 ; AC1.2 AC1.2@2715.16,1209.7 ; AC1.12 2722.24,1342.07 2710.43,1353.88 2686.81,1353.88 2686.81,1377.5 v1(2675,1389.32) 2657.09,1407.22 2547.78,1407.22 2525,1430 2525,1539.37 2548.64,1563.01 2555.3,1563.01 C10.2 ; U2.81 2745.65,2189.07 2745.65,2165.42 2757.19,2153.88 3086.59,2153.88 3098.13,2165.42 ; U2.99@3099.06,2188.15 3099.06,1940.94 3109.84,1930.16 ; v1(3102.38,1376.32) 3102.38,1442.89 C1.2 3120.81,1463.29 3080,1504.09 3064.46,1504.09 3001.56,1567 3001.56,1590.65 U2.32 3000.63,1820.94 3109.84,1930.16 ; v1(3109.88,1251.32) 3110.84,1250.36 3110.84,1247.39 C4.1@3142.38,1215.85 ; C4.1 C4.1@3142.38,1215.85 ; U2.11 3109.84,1930.16 ; ?.1 3290.22,1401.47 3285.16,1396.41 3285.16,1380.55 3244.35,1339.74 C3.2 3201.57,1298.94 3178.53,1298.94 3174.73,1295.14 C2.2 C4.1@3142.38,1215.85 ; C12.2 3299.41,1855.59 3285,1870 3285,1980 ; C13.2 3294.41,1970.59 3285,1980 ; 3429.63,1305.37 3430,1305 ; U1.5 3680.75,1274.25 3674.31,1280.69 3674.31,1315.41 3680,1321.1 3680,1330 3684.06,1334.06 3710.2,1334.06 U1.3 3710.2,1340.43 3679.57,1340.43 3665,1355 3445,1355 3428.66,1338.66 3428.66,1313.09 3428.03,1313.09 3420.69,1305.75 U1.21 3369.37,1305.75 3347.54,1283.91 3347.54,1273.63 3332.54,1258.63 3332.54,1163.89 3364.41,1132.02 C9.2 3368.35,1070 3385.37,1052.97 3385.37,1051.04 3401.42,1035 v1(3470,1035) 3780.04,1035 3889.59,1144.55 3889.59,1194.27 3878.5,1205.36 3854.55,1205.36 3843.46,1216.45 3843.46,1268.46 3912.5,1337.5 ; 3738.7,1765.87 3746.57,1765.87 3810.71,1830 v1(3840,1830) 3841.35,1830 3844.8,1833.44 3877.42,1833.44 J2.5 ; v1(3765,1135) 3765.41,1135.41 3765.41,1152.22 3782.6,1169.41 Y1.2 ; C7.2 3835.59,1479.41 3840,1475 3875.24,1475 3876.52,1473.72 3943.72,1473.72 3950,1480 ; C6.2 3950.59,1415.42 3912.5,1377.33 3912.5,1337.5 ; v1(3970,1395) 3912.5,1337.5 ; C10.2 2537.5,1600.22 2537.5,1822.25 2502.5,1857.25 2502.5,2012.25 2500,2014.75 v1(2500,2155) 2500,2181.21 2563.79,2245 3281.21,2245 3330,2196.21 C14.2 3290.59,2085.59 3285,2080 3285,1980 ; 2660,1185 2663.25,1181.75 2706.75,1181.75 2714.07,1189.07 2714.07,1208.62 AC1.2@2715.16,1209.7
Net_2: ?.2 C3.1 C4.2 i/o.11 | length 734.3
  Top Layer w5: i/o.11 3074.09,1241.93 3081.77,1241.93 v1(3112.38,1211.32)
  Bottom Layer w5: v1(3112.38,1211.32) 3112.38,1192.74 3123.42,1181.69 3125.35,1181.69 C4.2@3142.38,1164.67 ; ?.2 3217.38,1441.24 3226.69,1450.55 3258.23,1450.55 3273.23,1465.55 3307.21,1465.55 3314.53,1458.23 3314.53,1404.57 3302.54,1392.58 3302.54,1293.64 3292.84,1283.94 3265.59,1283.94 3157.6,1175.94 3153.66,1175.94 C4.2@3142.38,1164.67 ; C3.1 3156.28,1142.89 3142.38,1156.79 C4.2 C4.2@3142.38,1164.67
Net_3: ?.3 AC1.1 AC1.6 AC1.7 C1.1 C2.1 C5.2 C21.1 C22.1 D1.2 i/o.9 i/o.10 IC1.8 neo.23 R1.2 R2.2 R19.1 R20.1 U6.2 | length 6822.1
  Top Layer w5: v1(2520,1745) 2520,1880 2627.72,1987.72 neo.23 2627.72,2149.21 2566.5,2210.43 2566.5,2239.57 2654.23,2327.3 2946.82,2327.3 2949.13,2325 v1(2975,2325) ; IC1.8 2960.94,2165.94 2980,2185 v1(2980,2265) ; v1(3024.9,1200) 3041.57,1183.33 i/o.9 i/o.10 ; U6.2 3700,1375 3707.93,1367.07 3808.06,1367.07 3825.39,1384.41 C22.1 3867.87,1376.54 C21.1 3953.46,1376.54 3980,1350 3980,1320 v1(3960,1300)
  Bottom Layer w5: v1(2520,1745) 2520,1588.72 2510,1578.72 2510,1420 2540.28,1389.72 2584.72,1389.72 ; AC1.7 AC1.7@2581.26,1260 ; AC1.6 2604.43,1208.62 2604.43,1112.7 ; v1(2645,1389.72) v1@2644.72,1389.72 ; AC1.1 2753.74,1173.27 C5.2@2721.06,1140.59 ; R2.2@2912.38,1124.82 2877.38,1159.82 2877.38,1307.82 2923.96,1354.39 C1.1 2983.68,1461.32 3086.18,1358.82 3133.82,1358.82 C2.1@3142.38,1350.26 ; R1.2 2852.22,1344.78 2821.54,1314.09 R20.1 2821.54,1310.16 2852.38,1279.31 2852.38,1237.22 2853.72,1235.89 2853.72,1153.72 2845,1145 2824.41,1145 R19.1 2820,1140.59 C5.2@2721.06,1140.59 ; v1(2975,2325) 2975,2271.35 2980,2266.35 v1(2980,2265) ; v1(3024.9,1200) 3024.9,1127.26 2997.38,1099.74 2997.38,1062.38 2985,1050 2585,1050 2575,1060 2575,1142.13 ; C2.1 C2.1@3142.38,1350.26 ; ?.3 3253.8,1508.17 3244.49,1498.86 3182.95,1498.86 3178.8,1494.7 3178.8,1386.67 C2.1@3142.38,1350.26 ; v1(3960,1300) 3904.59,1244.59 3904.59,1138.33 3786.25,1020 3515,1020 3510,1015 2575,1015 2545,1045 2545,1350 2584.72,1389.72 ; 2575,1142.13 2575,1195 2572.38,1197.62 2572.38,1251.67 2580.71,1260 AC1.7@2581.26,1260 ; 2575,1142.13 2604.43,1112.7 ; AC1.7@2581.26,1260 2572.93,1268.33 2572.93,1357.07 2575.86,1360 2615,1360 v1@2644.72,1389.72 ; 2584.72,1389.72 v1@2644.72,1389.72 ; 2604.43,1112.7 2606.54,1110.59 2691.54,1110.59 2701.91,1120.96 2701.91,1129.31 2713.19,1140.59 C5.2 C5.2@2721.06,1140.59
NetAC1_13: AC1.13 R20.2 U2.44 | length 464.2
  Top Layer w5: v1(2718.94,1370.12) 2741.15,1370.12 2743.18,1368.09 2764.04,1368.09 ; v1(2745,1345) 2764.04,1364.04 2764.04,1368.09 ; v1(2776.54,1380.59) 2764.04,1368.09
  Bottom Layer w5: v1(2718.94,1370.12) 2717.98,1371.08 2717.98,1377.02 v1(2705,1390) 2764.41,1449.41 U2.44 ; v1(2745,1345) 2745,1344.8 2753.74,1336.06 AC1.13 ; v1(2776.54,1380.59) 2820,1380.59 R20.2 2821.54,1377.09 2804.35,1359.9 R20.2@2803.86,1359.9
NetAC1_14: AC1.14 R19.2 U2.43 | length 454.4
  Bottom Layer w5: AC1.14 AC1.14@2769.29,1260 ; U2.43@2785,1590.67 U2.43 2784.09,1434.09 v1(2740,1390) 2777.62,1352.38 2777.62,1268.33 AC1.14@2769.29,1260 ; R19.2@2821.54,1211.02 2804.35,1228.21 2801.08,1228.21 AC1.14@2769.29,1260
NetAT_GPS_1: AT_GPS.1 L1.1 neo.11 | length 365.3
  Top Layer w5: L1.1 2970.55,1475 3045.55,1550 3150.11,1550 AT_GPS.1 3160,1549.96 3142.81,1567.15 3123.05,1567.15 3105.53,1584.66 3105.53,1610.22 neo.11
NetC6_1: C6.1 C7.1 C8.1 C12.1 C13.1 C14.1 C15.1 C20.1 D3.1 IC4.3 U1.4 U1.6 U1.18 U2.10 U2.31 U2.61 U2.80 U2.100 U6.3 | length 5472.1
  Top Layer w5: D3.1 3440.33,1331.87 3440.33,1346.99 3448.03,1354.69 3455.12,1354.69 3480,1379.57 C15.1 ; IC4.3@3438.74,1424.31 3429.43,1415 IC4.3 3433.52,1405.69 3457.81,1405.69 3480,1383.5 C15.1 ; U6.3 3609.45,1406.61 3592.26,1389.43 3542.89,1389.43 C20.1 ; v1(3930,1320) 3680,1320 3618.46,1381.54 C20.1 ; C15.1 C20.1
  Bottom Layer w5: U2.61 2582.38,1852.34 2558.73,1852.34 2522.5,1888.57 2522.5,2182.5 2570,2230 2708.69,2230 2724.11,2214.58 ; U2.80 2725.97,2190.93 2725.97,2214.58 2741.39,2230 3102.39,2230 3117.81,2214.58 3117.81,2176.96 U2.100@3118.74,2176.04 ; U2.31 3021.24,1592.5 3021.24,1616.24 3030,1625 3030.09,1625 3032.78,1627.7 3205.27,1627.7 3220,1642.43 3220,1942.07 3212.85,1949.22 3182.36,1949.22 U2.10 3180.81,1950.77 3157.15,1950.77 3118.74,1989.18 U2.100@3118.74,2176.04 ; C13.1 3330.59,1920 3360,1920 3375,1935 ; C14.1 3360.59,2034.41 3375,2020 3375,1935 ; U1.18 3664.65,1211.26 3696.14,1242.76 U1.6 3730.63,1242.76 3752.46,1264.59 3752.46,1283.91 U1.4@3730.63,1305.75 ; U1.4 U1.4@3730.63,1305.75 ; C8.1 C8.1@3817.34,1422.09 ; C6.1 3899.41,1525.59 3890,1535 ; v1(3930,1320) 3990,1320 3995,1325 3995,1510 3970,1535 3890,1535 ; U2.100@3118.74,2176.04 3120.98,2173.8 3178.28,2173.8 3265,2087.08 3265,1825 3285.59,1804.41 C12.1 ; C12.1 3330,1612.93 3332.93,1610 3612.5,1610 3647.5,1575 3687.48,1575 3717.48,1545 3777.34,1545 3787.34,1535 ; C12.1 3372.07,1804.41 3375,1807.34 3375,1935 ; U1.4@3730.63,1305.75 3759.26,1334.39 3759.26,1339.58 3783.21,1363.52 3783.21,1389.15 3816.14,1422.09 C8.1@3817.34,1422.09 ; 3787.34,1535 3890,1535 ; 3787.34,1535 3784.41,1532.07 C7.1 3784.41,1455.02 C8.1@3817.34,1422.09
NetC9_1: C9.1 U1.20 | length 262.4
  Top Layer w5: 3429.9,1268.75 3431.25,1268.75
  Bottom Layer w5: U1.20 3369.37,1274.25 3347.54,1252.42 3347.54,1170.1 3400.37,1117.27 3400.37,1081.28 3411.65,1070 C9.1
NetC10_1: C10.1 U2.34 Y2.3 | length 948
  Bottom Layer w5: C10.1 2540,1512.28 2540,1436.21 2553.99,1422.22 2662.34,1422.22 2694.53,1454.41 Y2.3 2711.13,1467.07 2732.07,1467.07 2735,1470 2735,1530.04 2730.02,1535.02 2725,1540 2640,1540 2628.88,1551.12 2628.88,1581.12 2625,1585 2625,1613.61 2646.39,1635 2941.49,1635 2960.33,1616.15 2960.33,1592.5 U2.34
NetC11_1: C11.1 U2.33 Y2.1 | length 647.7
  Bottom Layer w5: C11.1 2574.7,1466.99 2583.13,1466.99 2604.55,1488.41 2614.35,1488.41 Y2.1 2627.6,1505.59 2610.41,1522.78 2610.41,1573.39 2604.7,1579.09 2604.7,1629.7 2625,1650 2947.7,1650 2980.02,1617.68 2980.02,1592.5 U2.33
NetC16_1: C16.1 IC2.6 | length 56.5
  Top Layer w5: IC2.6 3883.19,1657.4 C16.1
NetC16_2: C16.2 IC2.5 Q1.3 R11.1 | length 444.9
  Top Layer w5: Q1.3@3824.68,1790 3806.54,1790 3795.85,1779.31 3791.95,1779.31 3784.63,1771.99 3784.63,1647.89 3802.22,1630.3 3818.92,1630.3 IC2.5 3873.35,1620 3885,1608.35 C16.2 3937.13,1604.41 R11.1 3945,1594.57 3980.61,1558.95 3980.61,1549.39 v1(4000,1530)
NetC17_2: C17.2 D5.1 D6.1 J1.4 J1.8 J2.1 | length 1308.1
  Top Layer w5: D5.1 D6.1@3761.69,2182.13 ; D6.1 D6.1@3761.69,2182.13 ; v1(3785,1835) 3785,1863.72 3773.72,1875 J1.4 3712.38,1875 3660,1927.38 3650.14,1927.38 3642.81,1934.7 3642.81,2111.4 3684.05,2152.64 3696.19,2152.64 3706.52,2162.97 3742.54,2162.97 D6.1@3761.69,2182.13 ; 4009.69,2145 4012.62,2142.07 4012.62,2075.14 3998.19,2060.71 3991.2,2060.71 3976.77,2046.28 J1.8 4014.29,2025 4019.29,2020 v1(4020,2020)
  Bottom Layer w5: v1(3785,1835) 3800,1850 3800,2020 3925,2020 ; J2.1 3882.8,1977.8 3925,2020 ; v1(4020,2020) 3925,2020
NetC18_1: C18.1 J1.5 L2.1 R11.2 | length 1411
  Top Layer w5: L2.1 3428.23,1245 3465.33,1207.89 3572.18,1207.89 3640.79,1276.5 3988.25,1276.5 3998.5,1286.75 3998.5,1467.2 3990,1475.7 ; C18.1 C18.1@3900,1734.57 ; J1.5 3988.72,1875 4020,1843.72 4020,1735 3992.38,1707.38 3940.14,1707.38 3930.14,1717.38 3917.19,1717.38 C18.1@3900,1734.57 ; v1(4000,1560) 4000,1600.55 3969.86,1630.69 3948.62,1630.69 3945,1634.31 R11.2 3945,1665.43 3927.81,1682.62 3925.85,1682.62 3900,1708.46 C18.1@3900,1734.57
NetD1_1: D1.1 R6.1 | length 158.7
  Top Layer w5: D1.1 2685.75,2225 2724.21,2263.46 R6.1 2780,2265.43 R6.1@2797.19,2282.62
NetD3_2: D3.2 IC4.2 L2.2 | length 308.6
  Top Layer w5: IC4.2 3338.58,1377.6 3410,1306.18 3410,1302.93 3412.93,1300 3494.18,1300 ; D3.2 3478.43,1330 3487.74,1320.69 3487.74,1306.45 3494.18,1300 ; L2.2 3512.83,1281.35 3494.18,1300
NetD5_2: D5.2 R7.1 | length 63.2
  Top Layer w5: D5.2 R7.1
NetD6_2: D6.2 R10.1 | length 58.2
  Top Layer w5: D6.2@3853.31,2195 R10.1
Neti/o_2: i/o.2 R1.1 U1.28 | length 1248.3
  Top Layer w5: v1(2957.38,1296.32) 2958.15,1297.09 2969.88,1297.09 2982.11,1309.31 i/o.2 3020.69,1309.31 v1(3030,1300)
  Bottom Layer w5: R1.1 2938.92,1277.85 v1(2957.38,1296.32) ; v1(3030,1300) 3047.57,1282.43 v1(3047.57,1101.29) 3068.86,1080 3299.61,1080 3302.54,1082.93 3302.54,1271.06 3317.54,1286.06 3317.54,1386.37 3329.53,1398.35 3329.53,1477.18 3344.81,1492.46 3512.42,1492.46 3534.25,1470.63 U1.28
Neti/o_3: i/o.3 R2.1 U1.27 | length 1210.8
  Top Layer w5: v1(2917.38,1231.32) 2918.34,1232.28 2926.57,1232.28 ; i/o.3@2982.11,1277.82 i/o.3 ; i/o.3@2983.58,1276.34 2980.67,1273.43 2967.72,1273.43 2926.57,1232.28 ; v1(3022.38,1099.74) 3022.38,1121.82 3019.45,1124.74 2955.31,1124.74 2952.38,1127.67 2952.38,1229.35 2949.45,1232.28 2926.57,1232.28
  Bottom Layer w5: R2.1 2912.38,1224.97 2917.38,1229.97 v1(2917.38,1231.32) ; v1(3022.38,1099.74) 3057.13,1065 3314.61,1065 3317.54,1067.93 3317.54,1264.84 3332.54,1279.84 3332.54,1380.15 3344.53,1392.14 3344.53,1406.89 3361.2,1423.56 3416.44,1423.56 3425.69,1414.31 3480.92,1414.31 3502.76,1436.14 U1.27
NetIC1_5: IC1.5 neo.18 | length 100.8
  Top Layer w5: neo.18 2844.25,2138.84 2858.11,2152.7 2867.07,2152.7 2870.47,2156.1 IC1.5 2870.47,2175.79 IC1.5@2867.07,2179.19
NetIC1_6: IC1.6 neo.19 | length 227.4
  Top Layer w5: neo.19 2814.19,2082.66 2814.19,2057.11 2823.33,2047.97 2865.18,2047.97 2890.16,2072.95 IC1.6
NetIC2_1: IC2.1 Q1.4 | length 61.6
  Top Layer w5: IC2.1 3734.13,1660.75 Q1.4
NetIC2_2: IC2.2 R8.1 | length 397.3
  Top Layer w5: IC2.2@3741.08,1609.7 IC2.2 v1(3780,1620) ; R8.1@3980,1726.54 R8.1 3991.54,1741.54 v1(4000,1750)
  Bottom Layer w5: v1(3780,1620) 3910,1750 v1(4000,1750)
NetIC2_3: IC2.3 Q1.6 | length 265.6
  Top Layer w5: IC2.3 3720.49,1592.89 3699.11,1592.89 3694.07,1597.93 3694.07,1771.99 3701.4,1779.31 3705.3,1779.31 3718.39,1792.4 Q1.6
NetJ1_2: J1.2 R12.2 | length 93.8
  Top Layer w5: R12.2 3688.46,1975 J1.2
NetJ1_6: J1.6 R10.2 | length 356.9
  Top Layer w5: J1.6 3978.46,1926.69 3978.46,1945.79 3981.39,1948.72 4011.97,1948.72 4040,1976.75 4040,2135.9 4015.9,2160 3986.28,2160 3978.46,2167.81 R10.2
NetJ1_7: J1.7 R7.2 | length 180.7
  Top Layer w5: J1.7 3968.95,1982.82 3937.18,1982.82 3934.25,1985.75 3934.25,2043.96 3959.31,2069.02 3959.31,2082.81 3976.5,2100 R7.2
NetL1_2: L1.2 R9.1 | length 116.9
  Top Layer w5: R9.1 2765.98,1451.54 2789.45,1475 L1.2
Netneo_8: neo.8 neo.9 R9.2 | length 361.8
  Top Layer w5: R9.2 2700,1520.43 2717.19,1537.62 2719.15,1537.62 2741.54,1560 2870,1560 2900.53,1590.53 2949.11,1590.53 2962.36,1603.78 neo.8 neo.9
Netneo_20: neo.20 U2.63 | length 293.6
  Top Layer w5: v1(2634.9,1914.77) 2634.77,1914.9 2634.77,1929.77 2744.39,2039.39 2744.39,2082.66 neo.20
  Bottom Layer w5: U2.63 2584.23,1891.71 2611.85,1891.71 v1(2634.9,1914.77)
Netneo_21: neo.21 U2.64 | length 253.6
  Top Layer w5: v1(2625,1950) 2714.33,2039.33 neo.21
  Bottom Layer w5: U2.64 2584.23,1911.4 2607.89,1911.4 2619.43,1922.94 2619.43,1943.08 2625,1948.65 v1(2625,1950)
Netneo_22: neo.22 R6.2 | length 168.7
  Top Layer w5: neo.22 2684.27,2109.15 2684.27,2134.71 2726.95,2177.38 2762.81,2177.38 2780,2194.57 R6.2 R6.2@2780,2198.5
NetR3_1: R3.1 U1.30 | length 154.9
  Bottom Layer w5: R3.1 3520.65,1517.81 3550.06,1517.81 3597.24,1470.63 U1.30 U1.30@3597.24,1436.14
NetR3_2: R3.2 U2.3 | length 735.5
  Bottom Layer w5: U2.3 3182.66,2086.71 3206.31,2086.71 3235,2058.02 3235,1628.25 3293.25,1570 3399.57,1570 3434.57,1535 R3.2
NetR4_1: R4.1 U1.31 | length 99.2
  Bottom Layer w5: U1.31 3628.74,1497.24 3666.5,1535 R4.1
NetR4_2: R4.2 U2.2 | length 923.5
  Bottom Layer w5: U2.2 3182.66,2106.4 3207.84,2106.4 3250,2064.24 3250,1634.47 3299.47,1585 3575,1585 3582.38,1577.62 3582.38,1552.19 3599.57,1535 R4.2
NetU1_7: U1.7 Y1.3 | length 77
  Bottom Layer w5: U1.7 3733.64,1211.26 3742.97,1220.59 Y1.3
NetU1_8: U1.8 Y1.1 | length 254.4
  Bottom Layer w5: U1.8@3726.63,1172.07 3718.94,1179.76 U1.8 3712.69,1179.76 3705,1172.07 3705,1117.93 3707.93,1115 3795.12,1115 3849.53,1169.41 Y1.1
NetU2_12: U2.12
NetU2_13: U2.13
NetU2_45: U2.45
NetU2_46: U2.46
pads on no net: AC1.3 AC1.8 AC1.9 AC1.10 AC1.11 AT_GPS.2 i/o.1 i/o.5 i/o.6 i/o.7 i/o.8 i/o.13 i/o.14 IC1.9 IC2.4 J1.9 J2.2 J2.3 J2.4 J2.MP1 J2.MP2 J2.MP3 J2.MP4 neo.1 neo.2 neo.3 neo.4 neo.5 neo.6 neo.14 neo.15 neo.16 neo.17 Q1.2 Q1.5 U1.1 U1.2 U1.9 U1.10 U1.11 U1.12 U1.13 U1.14 U1.15 U1.16 U1.17 U1.19 U1.22 U1.23 U1.24 U1.25 U1.26 U1.29 U1.32 U2.1 U2.4 U2.5 U2.6 U2.7 U2.8 U2.9 U2.14 U2.15 U2.16 U2.17 U2.18 U2.19 U2.20 U2.21 U2.22 U2.23 U2.24 U2.25 U2.26 U2.27 U2.28 U2.29 U2.30 U2.35 U2.36 U2.37 U2.38 U2.39 U2.40 U2.41 U2.42 U2.47 U2.48 U2.49 U2.50 U2.51 U2.52 U2.53 U2.54 U2.55 U2.56 U2.57 U2.58 U2.59 U2.60 U2.65 U2.66 U2.67 U2.68 U2.69 U2.70 U2.71 U2.72 U2.73 U2.74 U2.75 U2.76 U2.77 U2.78 U2.79 U2.82 U2.83 U2.84 U2.85 U2.86 U2.87 U2.88 U2.89 U2.90 U2.91 U2.92 U2.93 U2.94 U2.95 U2.96 U2.97 U2.98 U6.4 Y2.2 Y2.4
copper on no net:
  other v2: 3510,1780 3510,1845 3510,1910 3510,1975 3370,2285 3435,2285 3500,2285 3565,2285

## Polygon pours and split planes (outlines as drawn)
no net on Multi-Layer "NONET_L02_P002" (solid, pour order 2): 3625,2325 3625,2250 3325,2250 3325,2325
no net on Multi-Layer "NONET_L02_P001" (solid, pour order 1): 3575,2025 3455,2025 3450,2020 3450,1705 3575,1705

## Other copper
Top Layer:
  text "Display" at 3540,2330.62 h30
  text "SIM" at 3525,2030.42 h30